# Altium PCB BB8_BMS.PcbDoc
Units mil, origin at the board's own origin, x right, y up, seen from the top; angles counter-clockwise.
Board outline 3812.11 x 6350 mil, 2 copper layers (Top Layer, Bottom Layer), stack 59.8 mil thick; 116 components, 159 nets, 458 pads, 0 vias.
Unrouted connection lines stored in the file: 281.
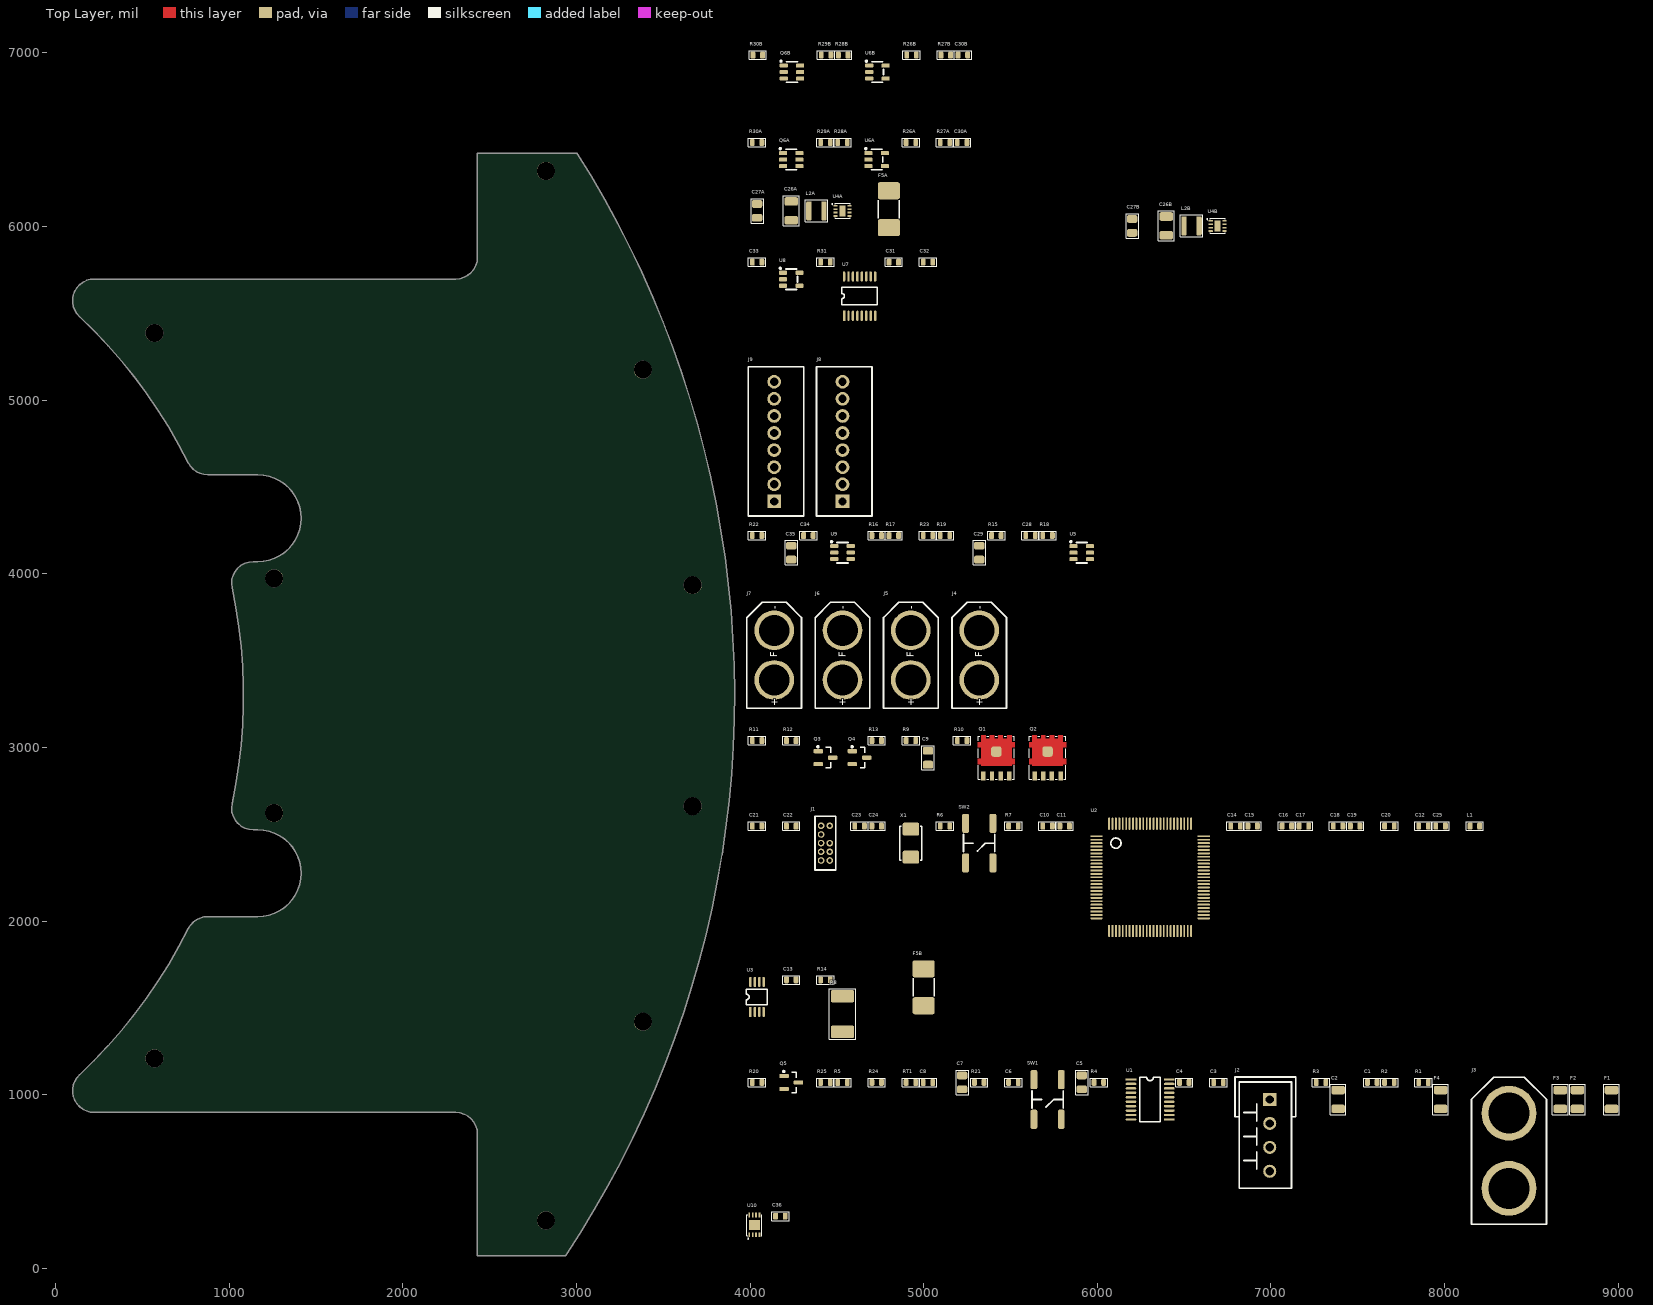
[diagram p0: Top Layer view]
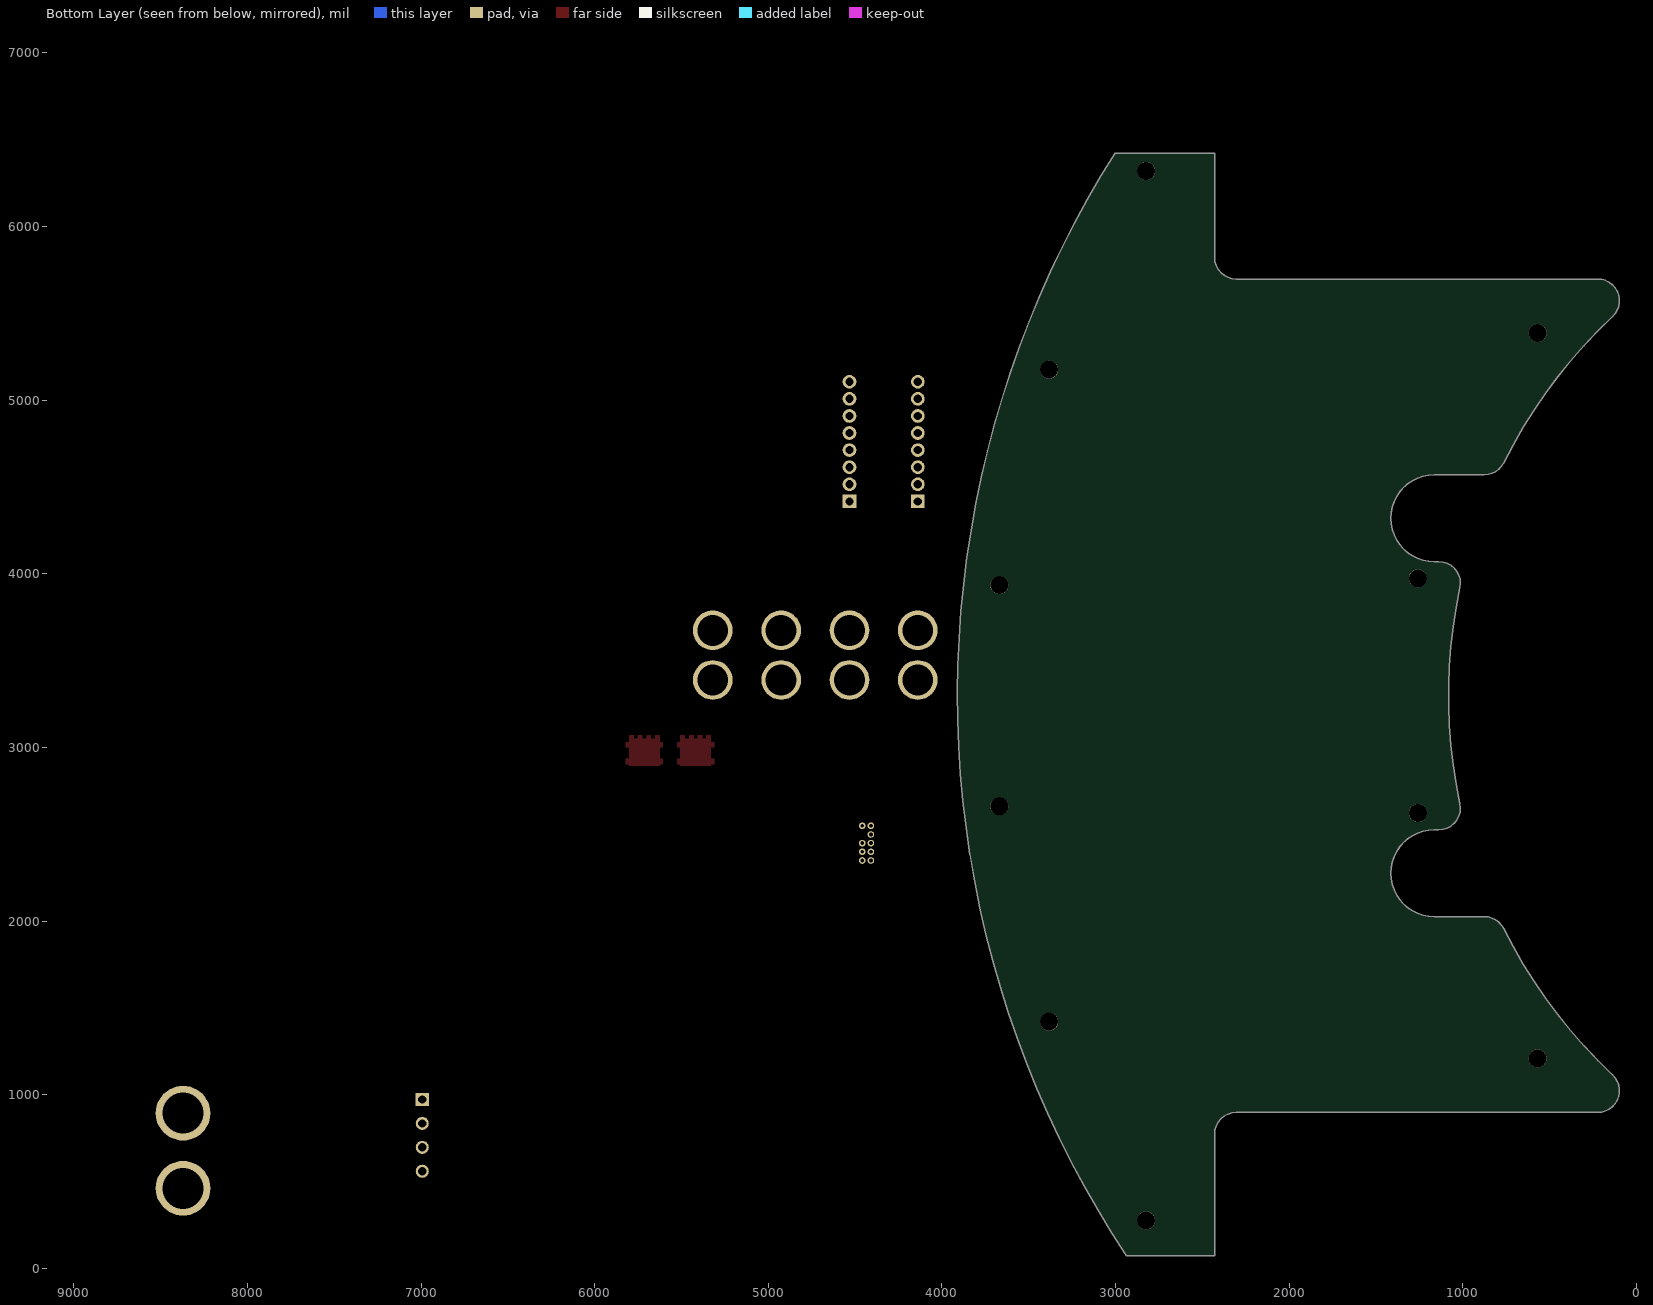
[diagram p1: Bottom Layer view, seen from below]

## Layer stack, top to bottom
Top Solder: solder mask 0.4, Solder Resist, Dk 3.5
Top Layer: signal copper 1.4
Dielectric 1: dielectric 57, FR-4, Dk 4.8
Bottom Layer: signal copper 1.4
Bottom Solder: solder mask 0.4, Solder Resist, Dk 3.5

## Board outline
876.98,4570.3 854.05,4572.42 831.9,4578.71 811.28,4588.96 792.89,4602.82 777.35,4619.81 765.2,4639.37 710.65,4743.24 652.09,4844.91 589.59,4944.2 523.26,5040.97 453.19,5135.07 379.49,5226.36 302.27,5314.69 221.66,5399.94 137.77,5481.96 122.58,5499.13 110.78,5518.78 102.77,5540.25 98.81,5562.82 99.04,5585.74 103.46,5608.23 111.9,5629.54 124.09,5648.95 139.62,5665.8 157.97,5679.54 178.52,5689.7 200.57,5695.93 223.4,5698.03 2305.15,5698.03 2329.54,5700.43 2352.99,5707.55 2374.6,5719.1 2393.54,5734.64 2409.08,5753.58 2420.64,5775.2 2427.75,5798.64 2430.15,5823.03 2430.15,6423.03 3002.82,6423.03 3084.75,6290.08 3163.08,6154.98 3237.77,6017.83 3308.76,5878.73 3375.99,5737.78 3439.43,5595.08 3499.03,5450.73 3554.73,5304.84 3606.51,5157.5 3654.33,5008.84 3698.15,4858.94 3737.93,4707.93 3773.66,4555.9 3805.31,4402.98 3832.84,4249.26 3856.26,4094.86 3875.52,3939.88 3890.63,3784.45 3901.58,3628.67 3908.34,3472.65 3910.93,3316.5 3909.33,3160.34 3903.55,3004.28 3893.6,2848.43 3879.47,2692.91 3861.19,2537.81 3838.76,2383.27 3812.19,2229.38 3781.52,2076.25 3746.75,1924 3707.92,1772.74 3665.06,1622.57 3618.18,1473.61 3567.34,1325.95 3512.56,1179.71 3453.88,1034.98 3391.34,891.88 3325,750.51 3254.9,610.96 3181.08,473.34 3103.6,337.75 3022.52,204.28 2937.9,73.03 2430.15,73.03 2430.15,773.03 2427.75,797.42 2420.64,820.87 2409.08,842.48 2393.54,861.42 2374.6,876.96 2352.99,888.52 2329.54,895.63 2305.15,898.03 223.4,898.03 200.57,900.13 178.52,906.36 157.97,916.52 139.62,930.26 124.09,947.11 111.9,966.52 103.46,987.83 99.04,1010.32 98.81,1033.24 102.77,1055.81 110.78,1077.28 122.58,1096.93 137.77,1114.1 221.66,1196.12 302.27,1281.37 379.49,1369.7 453.19,1460.99 523.26,1555.09 589.59,1651.86 652.09,1751.15 710.65,1852.82 765.2,1956.69 777.35,1976.25 792.89,1993.24 811.28,2007.1 831.9,2017.35 854.05,2023.64 876.98,2025.76 1165.19,2025.76 1197.82,2027.9 1229.89,2034.28 1260.86,2044.79 1290.19,2059.25 1317.38,2077.42 1341.97,2098.98 1363.53,2123.57 1381.7,2150.76 1396.16,2180.09 1406.67,2211.06 1413.05,2243.13 1415.19,2275.76 1413.05,2308.39 1406.67,2340.46 1396.16,2371.43 1381.7,2400.76 1363.53,2427.95 1341.97,2452.54 1317.38,2474.1 1290.19,2492.27 1260.86,2506.73 1229.89,2517.24 1197.82,2523.62 1165.19,2525.76 1139.17,2525.76 1114.61,2528.19 1091.02,2535.4 1069.3,2547.11 1050.3,2562.85 1034.76,2582.02 1023.3,2603.86 1016.34,2627.54 1014.17,2652.11 1016.87,2676.64 1038.32,2788.39 1055.51,2900.89 1068.42,3013.95 1077.04,3127.42 1081.36,3241.13 1081.36,3354.93 1077.04,3468.64 1068.42,3582.11 1055.51,3695.18 1038.32,3807.67 1016.87,3919.42 1014.17,3943.95 1016.34,3968.53 1023.3,3992.2 1034.76,4014.04 1050.3,4033.21 1069.3,4048.95 1091.02,4060.66 1114.61,4067.87 1139.17,4070.3 1165.19,4070.3 1197.82,4072.44 1229.89,4078.82 1260.86,4089.33 1290.19,4103.79 1317.38,4121.96 1341.97,4143.52 1363.53,4168.11 1381.7,4195.3 1396.16,4224.63 1406.67,4255.6 1413.05,4287.67 1415.19,4320.3 1413.05,4352.93 1406.67,4385.01 1396.16,4415.97 1381.7,4445.3 1363.53,4472.49 1341.97,4497.08 1317.38,4518.64 1290.19,4536.81 1260.86,4551.27 1229.89,4561.78 1197.82,4568.16 1165.19,4570.3

## Design rules (kind name [scope] priority, off if disabled: settings)
Clearance Clearance_HV [InNetClass('HV') vs NOT ((OnLayer('Top Overlay') OR OnLayer('Bottom Overlay')))] p1: gap=50 ignorepadtopadclearanceinfootprint=FALSE except(0: Arc-Hole Track-Hole SMDPad-Hole THPad-Hole Via-Hole Fill-Hole Poly-Hole Region-Hole Text-Hole; 40: THPad-THPad)
Clearance Clearance_MV [InNetClass('MV') vs NOT ((OnLayer('Top Overlay') OR OnLayer('Bottom Overlay')))] p2: gap=20 ignorepadtopadclearanceinfootprint=FALSE except(0: Arc-Hole Track-Hole SMDPad-Hole THPad-Hole Via-Hole Fill-Hole Poly-Hole Region-Hole Text-Hole)
Clearance "Polygon Clearance" [InPoly] p3: gap=16 ignorepadtopadclearanceinfootprint=FALSE except(0: Arc-Hole Track-Hole SMDPad-Hole THPad-Hole Via-Hole Fill-Hole Poly-Hole Region-Hole Text-Hole)
Clearance [NOT ((OnLayer('Top Overlay') OR OnLayer('Bottom Overlay')))] p4: gap=7.5 ignorepadtopadclearanceinfootprint=FALSE except(0: Arc-Hole Track-Hole SMDPad-Hole THPad-Hole Via-Hole Fill-Hole Poly-Hole Region-Hole Text-Hole)
DiffPairsRouting [All] p1: maxlimit=12 minlimit=7.5 mostfreqgap=7.5 toplayer_minwidth=6 toplayer_maxwidth=12 toplayer_prefwidth=10 bottomlayer_minwidth=6 bottomlayer_maxwidth=12 bottomlayer_prefwidth=10 maxuncoupledlength=500
HoleSize [All] p1: absolutevalues=TRUE maxlimit=250 minlimit=15 maxpercent=80.000 minpercent=20.000
MinimumSolderMaskSliver [All] p1 off: minsoldermaskwidth=4
PlaneClearance PlaneClearance_HV [InNetClass('HV')] p1: clearance=50
PlaneClearance PlaneClearance_MV [InNetClass('MV')] p2: clearance=30
PlaneClearance [All] p3: clearance=20
PlaneConnect [All] p1: planeconnectstyle=Relief reliefexpansion=10 reliefentries=4 reliefconductorwidth=12 reliefairgap=6
PolygonConnect PolygonConnectVias [IsVia] p1: connectstyle=Direct reliefconductorwidth=10 reliefentries=4 polygonreliefangle="90 Angle" airgapwidth=10
PolygonConnect [All] p2: connectstyle=Relief reliefconductorwidth=12 reliefentries=4 polygonreliefangle="90 Angle" airgapwidth=7.5
RoomDefinition U_FRAM [InComponentClass('U_FRAM')] p1: confinementstyle=ConfineIn formatcopy=TRUE lockcomponents=FALSE outline 3950,150 4250,150 4250,400 3950,400
RoomDefinition U_Volt_Meas2 [InComponentClass('U_Volt_Meas2')] p2: confinementstyle=ConfineIn formatcopy=TRUE lockcomponents=FALSE outline 3946.27,6791.34 5324.22,6791.34 5324.22,7086.61 3946.27,7086.61
RoomDefinition U_Volt_Meas1 [InComponentClass('U_Volt_Meas1')] p3: confinementstyle=ConfineIn formatcopy=TRUE lockcomponents=FALSE outline 3942.32,6287.4 5320.28,6287.4 5320.28,6582.68 3942.32,6582.68
RoomDefinition U_Temp_Mux [InComponentClass('U_Temp_Mux')] p4: confinementstyle=ConfineIn formatcopy=TRUE lockcomponents=FALSE outline 3942.32,5401.58 5123.43,5401.58 5123.43,5893.7 3942.32,5893.7
RoomDefinition U_Current_Meas [InComponentClass('U_Current_Meas')] p5: confinementstyle=ConfineIn formatcopy=TRUE lockcomponents=FALSE outline 3942.32,1267.72 4631.3,1267.72 4631.3,1759.84 3942.32,1759.84
RoomDefinition U_Buck_Regulator2 [InComponentClass('U_Buck_Regulator2')] p6: confinementstyle=ConfineIn formatcopy=TRUE lockcomponents=FALSE outline 6102.36,5905.51 6791.34,5905.51 6791.34,6200.79 6102.36,6200.79
RoomDefinition U_Buck_Regulator1 [InComponentClass('U_Buck_Regulator1')] p7: confinementstyle=ConfineIn formatcopy=TRUE lockcomponents=FALSE outline 3942.32,5992.13 4631.3,5992.13 4631.3,6287.4 3942.32,6287.4
RoutingVias [All] p1: holewidth=15 width=30 viastyle="Through Hole" minholewidth=15 minwidth=20 maxholewidth=250 maxwidth=500
SMDNeckDown [All] p1: percent=100.000
SilkToSilkClearance [All] p1 off: silktosilkclearance=10
SilkToSolderMaskClearance [IsPad] p1: minsilkscreentomaskgap=6 clearancetoexposedcopper=TRUE
SolderMaskExpansion [All] p1: expansion=4
ViasUnderSMD [All] p1: allowed=FALSE
Width [All] p1: maxlimit=1000 minlimit=6 preferedwidth=10 minimp=50.000000 maximp=50.000000 favimp=50.000000 checkconnectedcopper=TRUE
23 further rules are at their usual default settings.

## Classes and differential pairs
component class U_FRAM: C36 U10
channel class Volt_Meas: U_Volt_Meas1 U_Volt_Meas2
component class U_Volt_Meas2: C30B Q6B R26B R27B R28B R29B R30B U6B
component class U_Volt_Meas1: C30A Q6A R26A R27A R28A R29A R30A U6A
component class U_Temp_Mux: C31 C32 C33 R31 U7 U8
channel class Buck_Regulator: U_Buck_Regulator1 U_Buck_Regulator2
component class U_Temp_Meas: J8 J9
component class U_Power_Regulation: C28 C29 C34 C35 R15 R16 R17 R18 R19 R22 R23 U5 U9
component class U_Power_Distribution: J4 J5 J6 J7
component class U_Buck_Regulator2: C26B C27B F5B L2B U4_U_Buck_Regulator2 U4B
component class U_Buck_Regulator1: C26A C27A F5A L2A U4_U_Buck_Regulator1 U4A
component class U_Power_Control: C9 Q1 Q2 Q3 Q4 R9 R10 R11 R12 R13
component class U_Micro: C10 C11 C12 C14 C15 C16 C17 C18 C19 C20 C21 C22 C23 C24 C25 J1 L1 R6 R7 SW2 U2 X1
component class U_Current_Meas: C13 R8 R14 U3
component class U_Batt_Meas: C1 C2 C3 C4 C5 C6 C7 C8 F1 F2 F3 F4 J2 J3 Q5 R1 R2 R3 R4 R5 R20 R21 R24 R25 RT1 SW1 U1

## Components (designator, comment, footprint, x,y, rotation, side; value= is the part's Value field where it differs from the comment)
C1 "CAP 1uF 16V X7R" 0603_CAPACITOR 7584.06,1070.87 r0 top value=1uF
C2 "CAP 10uF 50V X5R" 1206_CAPACITOR 7387.21,972.44 r90 top value=10uF
C3 "CAP 1uF 16V X7R" 0603_CAPACITOR 6698.23,1070.87 r0 top value=1uF
C4 "CAP 1uF 16V X7R" 0603_CAPACITOR 6501.38,1070.87 r0 top value=1uF
C5 "CAP 4.7uF 16V X5R" 0805_Capacitor 5910.83,1070.87 r90 top value=4.7uF
C6 "CAP 1uF 16V X7R" 0603_CAPACITOR 5517.13,1070.87 r0 top value=1uF
C7 "CAP 1uF 16V X7R" 0805_Capacitor 5221.85,1070.87 r90 top value=1uF
C8 "CAP 1uF 16V X7R" 0603_CAPACITOR 5025,1070.87 r0 top value=1uF
C9 "CAP 0.01uF 50V X7R" 0805_Capacitor 5025,2940.95 r90 top value=0.01uF
C10 "CAP 0.1uF 50V X7R" 0603_CAPACITOR 5713.98,2547.24 r0 top value=0.1uF
C11 "CAP 0.1uF 50V X7R" 0603_CAPACITOR 5812.4,2547.24 r0 top value=0.1uF
C12 "CAP 1uF 16V X7R" 0603_CAPACITOR 7879.33,2547.24 r0 top value=1uF
C13 "CAP 0.1uF 50V X7R" 0603_CAPACITOR 4237.6,1661.42 r0 top value=0.1uF
C14 "CAP 1uF 16V X7R" 0603_CAPACITOR 6796.65,2547.24 r0 top value=1uF
C15 "CAP 0.1uF 50V X7R" 0603_CAPACITOR 6895.08,2547.24 r0 top value=0.1uF
C16 "CAP 0.1uF 50V X7R" 0603_CAPACITOR 7091.93,2547.24 r0 top value=0.1uF
C17 "CAP 0.1uF 50V X7R" 0603_CAPACITOR 7190.35,2547.24 r0 top value=0.1uF
C18 "CAP 0.1uF 50V X7R" 0603_CAPACITOR 7387.21,2547.24 r0 top value=0.1uF
C19 "CAP 0.1uF 50V X7R" 0603_CAPACITOR 7485.63,2547.24 r0 top value=0.1uF
C20 "CAP 0.1uF 50V X7R" 0603_CAPACITOR 7682.48,2547.24 r0 top value=0.1uF
C21 "CAP 2.2uF 16V X5R" 0603_CAPACITOR 4040.75,2547.24 r0 top value=2.2uF
C22 "CAP 2.2uF 16V X5R" 0603_CAPACITOR 4237.6,2547.24 r0 top value=2.2uF
C23 "CAP 18pF 50V NP0" 0603_CAPACITOR 4631.3,2547.24 r0 top value=18pF
C24 "CAP 18pF 50V NP0" 0603_CAPACITOR 4729.72,2547.24 r0 top value=18pF
C25 "CAP 0.1uF 50V X7R" 0603_CAPACITOR 7977.76,2547.24 r0 top value=0.1uF
C26A "CAP 10uF 50V X5R" 1206_CAPACITOR 4237.6,6090.55 r90 top value=10uF (schematic designator C26)
C26B "CAP 10uF 50V X5R" 1206_CAPACITOR 6397.64,6003.94 r90 top value=10uF (schematic designator C26)
C27A "CAP 22uF 16V X5R" 0805_Capacitor 4040.75,6090.55 r90 top value=22uF (schematic designator C27)
C27B "CAP 22uF 16V X5R" 0805_Capacitor 6200.79,6003.94 r90 top value=22uF (schematic designator C27)
C28 "CAP 0.1uF 50V X7R" 0603_CAPACITOR 5615.55,4220.47 r0 top value=0.1uF
C29 "CAP 4.7uF 16V X5R" 0805_Capacitor 5320.28,4122.05 r90 top value=4.7uF
C30A "CAP 0.1uF 50V X7R" 0603_CAPACITOR 5221.85,6484.25 r0 top value=0.1uF (schematic designator C30)
C30B "CAP 0.1uF 50V X7R" 0603_CAPACITOR 5225.8,6988.19 r0 top value=0.1uF (schematic designator C30)
C31 "CAP 0.1uF 50V X7R" 0603_CAPACITOR 4828.15,5795.28 r0 top value=0.1uF
C32 "CAP 0.1uF 50V X7R" 0603_CAPACITOR 5025,5795.28 r0 top value=0.1uF
C33 "CAP 1000pF 50V X7R" 0603_CAPACITOR 4040.75,5795.28 r0 top value=1000pF
C34 "CAP 0.1uF 50V X7R" 0603_CAPACITOR 4336.02,4220.47 r0 top value=0.1uF
C35 "CAP 4.7uF 16V X5R" 0805_Capacitor 4237.6,4122.05 r90 top value=4.7uF
C36 "CAP 0.1uF 50V X7R" 0603_CAPACITOR 4175,300 r0 top value=0.1uF
F1 "3413.0332.22" 1206_Fuse 8962.01,972.44 r90 top value=25A
F2 "3413.0332.22" 1206_Fuse 8765.16,972.44 r90 top value=25A
F3 "3413.0332.22" 1206_Fuse 8666.73,972.44 r90 top value=25A
F4 "3413.0332.22" 1206_Fuse 7977.76,972.44 r90 top value=25A
F5A "0157001.DR" F_157T 4800,6100 r90 top value=1A (schematic designator F5)
F5B "0157001.DR" F_157T 5000,1618.7 r90 top value=1A (schematic designator F5)
J1 "FTS-105-01-L-D" J_Cortex_JTAG 4434.45,2448.82 r90 top
J2 "1843622" 1843622 6993.5,972.44 r0 top
J3 "XT90" J_XT90_Thru 8371.46,677.17 r90 top
J4 "XT60" J_XT60_Thru_Female 5320.28,3531.5 r90 top
J5 "XT60" J_XT60_Thru_Female 4926.58,3531.5 r90 top
J6 "XT60" J_XT60_Thru_Female 4532.87,3531.5 r90 top
J7 "XT60" J_XT60_Thru_Female 4139.17,3531.5 r90 top
J8 "J_PHOENIX_8M_2.5" PHONIEX_8_2.5 4532.87,4712.6 r90 top
J9 "J_PHOENIX_8M_2.5" PHONIEX_8_2.5 4139.17,4712.6 r90 top
L1 "FERRITE 0603" 0603_Inductor 8174.61,2547.24 r0 top value=600R
L2A "NRS3015T2R2M" L_NRS_Series_3.0x3.0mm 4382.87,6090.55 r0 top value=2.2uH (schematic designator L2)
L2B "NRS3015T2R2M" L_NRS_Series_3.0x3.0mm 6542.91,6003.94 r0 top value=2.2uH (schematic designator L2)
Q1 "SI7157DP-T1-GE3" SO-8_PowerPAK(S) 5418.7,2940.95 r0 top
Q2 "SI7157DP-T1-GE3" SO-8_PowerPAK(S) 5713.98,2940.95 r0 top
Q3 "DMN3404L-7" SOT23-3 4434.45,2940.95 r0 top
Q4 "DMN3404L-7" SOT23-3 4631.3,2940.95 r0 top
Q5 "DMP2035U-7" SOT23-3 4237.6,1070.87 r0 top
Q6A "DMC3400SDW-7" SOT23-6 4237.6,6385.83 r0 top (schematic designator Q6)
Q6B "DMC3400SDW-7" SOT23-6 4241.54,6889.76 r0 top (schematic designator Q6)
R1 "R_0603_100_1%" 0603_RESISTOR 7879.33,1070.87 r0 top value=100
R2 "R_0603_100_1%" 0603_RESISTOR 7682.48,1070.87 r0 top value=100
R3 "R_0603_100_1%" 0603_RESISTOR 7288.78,1070.87 r0 top value=100
R4 "R_0603_100_1%" 0603_RESISTOR 6009.25,1070.87 r0 top value=100
R5 "R_0603_100_1%" 0603_RESISTOR 4532.87,1070.87 r0 top value=100
R6 "R_0603_1K_1%" 0603_RESISTOR 5123.43,2547.24 r0 top value=1K
R7 "R_0603_10K_1%" 0603_RESISTOR 5517.13,2547.24 r0 top value=10K
R8 "CSS2H-2512R-L500F" 2512_Resistor 4532.87,1464.57 r90 top value=0.5mR
R9 "R_0603_100K_1%" 0603_RESISTOR 4926.58,3039.37 r0 top value=100K
R10 "R_0603_100K_1%" 0603_RESISTOR 5221.85,3039.37 r0 top value=100K
R11 "R_0603_1M_1%" 0603_RESISTOR 4040.75,3039.37 r0 top value=1M
R12 "R_0603_1M_1%" 0603_RESISTOR 4237.6,3039.37 r0 top value=1M
R13 "R_0603_1K_1%" 0603_RESISTOR 4729.72,3039.37 r0 top value=1K
R14 "R_0603_100K_1%" 0603_RESISTOR 4434.45,1661.42 r0 top value=100K
R15 "R_0603_750K_1%" 0603_RESISTOR 5418.7,4220.47 r0 top value=750K
R16 "R_0603_240K_1%" 0603_RESISTOR 4729.72,4220.47 r0 top value=240K
R17 "R_0603_100K_1%" 0603_RESISTOR 4828.15,4220.47 r0 top value=100K
R18 "R_0603_105K_1%" 0603_RESISTOR 5713.98,4220.47 r0 top value=105K
R19 "R_0603_20K_1%" 0603_RESISTOR 5123.43,4220.47 r0 top value=20K
R20 "R_0603_100K_1%" 0603_RESISTOR 4040.75,1070.87 r0 top value=100K
R21 "R_0603_1K_1%" 0603_RESISTOR 5320.28,1070.87 r0 top value=1K
R22 "R_0603_100K_1%" 0603_RESISTOR 4040.75,4220.47 r0 top value=100K
R23 "R_0603_100K_1%" 0603_RESISTOR 5025,4220.47 r0 top value=100K
R24 "R_0603_10K_1%" 0603_RESISTOR 4729.72,1070.87 r0 top value=10K
R25 "R_0603_10K_1%" 0603_RESISTOR 4434.45,1070.87 r0 top value=10K
R26A "R_0603_100K_1%" 0603_RESISTOR 4926.58,6484.25 r0 top value=100K (schematic designator R26)
R26B "R_0603_100K_1%" 0603_RESISTOR 4930.52,6988.19 r0 top value=100K (schematic designator R26)
R27A "R_0603_100K_1%" 0603_RESISTOR 5123.43,6484.25 r0 top value=100K (schematic designator R27)
R27B "R_0603_100K_1%" 0603_RESISTOR 5127.37,6988.19 r0 top value=100K (schematic designator R27)
R28A "R_0603_1K_1%" 0603_RESISTOR 4532.87,6484.25 r0 top value=1K (schematic designator R28)
R28B "R_0603_1K_1%" 0603_RESISTOR 4536.82,6988.19 r0 top value=1K (schematic designator R28)
R29A "R_0603_20K_1%" 0603_RESISTOR 4434.45,6484.25 r0 top value=20K (schematic designator R29)
R29B "R_0603_20K_1%" 0603_RESISTOR 4438.39,6988.19 r0 top value=20K (schematic designator R29)
R30A "R_0603_100K_1%" 0603_RESISTOR 4040.75,6484.25 r0 top value=100K (schematic designator R30)
R30B "R_0603_100K_1%" 0603_RESISTOR 4044.69,6988.19 r0 top value=100K (schematic designator R30)
R31 "R_0603_10K_1%" 0603_RESISTOR 4434.45,5795.28 r0 top value=10K
RT1 "NCU18XH103F60RB" 0603_Resistor 4926.58,1070.87 r0 top value=10K
SW1 "SW_TACT_SWITCH_6x6" SW_6x6mm_SMD 5713.98,972.44 r90 top
SW2 "SW_TACT_SWITCH_6x6" SW_6x6mm_SMD 5320.28,2448.82 r90 top
U1 "BQ7692003PWR" TSSOP-20 6304.53,972.44 r0 top
U2 "STM32F405VGT6" LQFP-100 6304.53,2251.97 r0 top
U3 "MAX4070AUA+" uMAX-8 4040.75,1562.99 r90 top
U4A "TPS62160DSGR" WFDFN-8-EP 4532.87,6090.55 r0 top (schematic designator U4)
U4B "TPS62160DSGR" WFDFN-8-EP 6692.91,6003.94 r0 top (schematic designator U4)
U5 "SIP32509" SOT23-6 5910.83,4122.05 r0 top
U6A "TLV271CW5-7" SOT23-5 4729.72,6385.83 r0 top (schematic designator U6)
U6B "TLV271CW5-7" SOT23-5 4733.67,6889.76 r0 top (schematic designator U6)
U7 "U_MAX4581" TSSOP-16 4631.3,5598.43 r90 top
U8 "TLV271CW5-7" SOT23-5 4237.6,5696.85 r0 top
U9 "SIP32509" SOT23-6 4532.87,4122.05 r0 top
U10 "MB85RC64TAPN-G-AMEWE1" WFDFN-8-EP-Long 4025,250 r90 top
X1 "ABM3-8.000MHZ-D2Y-T" X_ABM3 4926.58,2448.82 r90 top value=8MHz

## Footprints (in the part's own frame and the unit in brackets; to place one, negate y for a bottom-side part, rotate by r counter-clockwise, add the part's x,y. Pads: shape width x height; smd on the part's side, far side on the other; paste and mask are expansions set on the pad)
0603_CAPACITOR [mm] "0603 Capacitor"
  rrect50% 0.7x1 smd: 1(-0.7,0) 2(0.7,0)
  silkscreen extent -1.27,-0.64 1.27,0.64, body extent -0.8,-0.4 0.8,0.4, height 0.3
0603_Inductor [mm] "0603 Inductor"
  rrect50% 0.7x1 smd: 1(-0.7,0) 2(0.7,0)
  silkscreen extent -1.27,-0.64 1.27,0.64, body extent -0.8,-0.4 0.8,0.4, height 0.8
0603_RESISTOR [mm] "0603 RESISTOR"
  rrect50% 0.7x1 smd: 1(-0.7,0) 2(0.7,0)
  silkscreen extent -1.27,-0.64 1.27,0.64, body extent -0.8,-0.4 0.8,0.4, height 0.3
0603_Resistor [mm] "0603 RESISTOR"
  rrect50% 0.7x1 smd: 1(-0.7,0) 2(0.7,0)
  silkscreen extent -1.27,-0.64 1.27,0.64, body extent -0.8,-0.4 0.8,0.4, height 0.3
0805_Capacitor [mil] "0805 Capacitor"
  rrect50% 45x60 smd: 1(-40,0) 2(40,0)
  silkscreen extent -70,-37 70,35, body extent -39,-25 39,25, height 30
1206_CAPACITOR [mm] "1206 Resistor/Capacitor"
  rrect50% 1.25x2 smd: 1(-1.375,0) 2(1.375,0)
  silkscreen extent -2.2,-1.14 2.2,1.14, body extent -1.6,-0.8 1.6,0.8, height 1
1206_Fuse [mm] "1206 Fuse"
  rrect50% 1.25x2 smd: 1(-1.375,0) 2(1.375,0)
  silkscreen extent -2.2,-1.14 2.2,1.14, body extent -1.61,-0.79 1.61,0.81, height 0.68
2512_Resistor [mm] "2512 Resistor"
  rrect25% 1.8x3.4 smd: 1(2.6,0) 2(-2.6,0)
  silkscreen extent -3.68,-1.91 3.68,1.91, body extent -3.35,-1.6 3.35,1.6, height 0.56
1843622 [mil]
  rect 75x75 hole 47: 1(0,0)
  round 75 hole 47: 2(0,-137.8) 3(0,-275.59) 4(0,-413.39)
  silkscreen extent -200,-512 150,130, body extent -168,-510 118,96, height 363
F_157T [mm] "Littelfuse 157T"
  rrect25% 2.5x3.25 smd: 1(-2.7,0) 2(2.7,0)
  silkscreen extent -1.3,-1.53 1.3,1.53, body extent -3.43,-1.58 3.43,1.58, height 2.65
J_Cortex_JTAG [mil] "JTAG Header for ARM Cortex MCUs"
  round 38 hole 22: 1(-100,-25) 2(-100,25) 3(-50,-25) 4(-50,25) 5(0,-25) 6(0,25) 8(50,25) 9(100,-25) 10(100,25)
  silkscreen extent -155,-60 155,60, body extent -127,-86 123,89, height 230
J_XT60_Thru_Female [mm]
  round 5.8 hole 4.5: 1(-3.625,0) 2(3.625,0)
  silkscreen extent -7.75,-4 7.75,4, body extent -7.77,-4.07 8.13,4.08, height 17.21
J_XT90_Thru [mm]
  round 8 hole 6: 1(-5.5,0) 2(5.5,0)
  silkscreen extent -10.75,-5.5 10.75,5.5, body extent -10.7,-5.5 10.7,5.5, height 20.71
L_NRS_Series_3.0x3.0mm [mm] "Taiyo Yuden 3.3mm NRS Series Inductor"
  rrect50% 0.8x2.8 smd: 1(-1.1,0) 2(1.1,0)
  silkscreen extent -1.65,-1.6 1.65,1.6, body extent -1.5,-1.5 1.5,1.5, height 1.46
LQFP-100 [mm] "100 pin LQFP, 0.5mm pitch"
  rect 1.8x0.27 smd: 1(-7.85,6)
  oval 1.8x0.27 smd: 2(-7.85,5.5) 3(-7.85,5) 4(-7.85,4.5) 5(-7.85,4) 6(-7.85,3.5) 7(-7.85,3) 8(-7.85,2.5) 9(-7.85,2) 10(-7.85,1.5) 11(-7.85,1) 12(-7.85,0.5) 13(-7.85,0) 14(-7.85,-0.5) 15(-7.85,-1) 16(-7.85,-1.5) 17(-7.85,-2) 18(-7.85,-2.5) 19(-7.85,-3) 20(-7.85,-3.5) 21(-7.85,-4) 22(-7.85,-4.5) 23(-7.85,-5) 24(-7.85,-5.5) 25(-7.85,-6) 51(7.85,-6) 52(7.85,-5.5) 53(7.85,-5) 54(7.85,-4.5) 55(7.85,-4) 56(7.85,-3.5) 57(7.85,-3) 58(7.85,-2.5) 59(7.85,-2) 60(7.85,-1.5) 61(7.85,-1) 62(7.85,-0.5) 63(7.85,0) 64(7.85,0.5) 65(7.85,1) 66(7.85,1.5) 67(7.85,2) 68(7.85,2.5) 69(7.85,3) 70(7.85,3.5) 71(7.85,4) 72(7.85,4.5) 73(7.85,5) 74(7.85,5.5) 75(7.85,6)
  oval 0.27x1.8 smd: 26(-6,-7.85) 27(-5.5,-7.85) 28(-5,-7.85) 29(-4.5,-7.85) 30(-4,-7.85) 31(-3.5,-7.85) 32(-3,-7.85) 33(-2.5,-7.85) 34(-2,-7.85) 35(-1.5,-7.85) 36(-1,-7.85) 37(-0.5,-7.85) 38(0,-7.85) 39(0.5,-7.85) 40(1,-7.85) 41(1.5,-7.85) 42(2,-7.85) 43(2.5,-7.85) 44(3,-7.85) 45(3.5,-7.85) 46(4,-7.85) 47(4.5,-7.85) 48(5,-7.85) 49(5.5,-7.85) 50(6,-7.85) 76(6,7.85) 77(5.5,7.85) 78(5,7.85) 79(4.5,7.85) 80(4,7.85) 81(3.5,7.85) 82(3,7.85) 83(2.5,7.85) 84(2,7.85) 85(1.5,7.85) 86(1,7.85) 87(0.5,7.85) 88(0,7.85) 89(-0.5,7.85) 90(-1,7.85) 91(-1.5,7.85) 92(-2,7.85) 93(-2.5,7.85) 94(-3,7.85) 95(-3.5,7.85) 96(-4,7.85) 97(-4.5,7.85) 98(-5,7.85) 99(-5.5,7.85) 100(-6,7.85)
  silkscreen extent -5.75,4.25 -4.25,5.75, body extent -8,-8 8,8, height 1.6
PHONIEX_8_2.5 [mm]
  rect 2x2 hole 1.2: 1(-7.5,0)
  round 2 hole 1.2: 2(-5,0) 3(-2.5,0) 4(0,0) 5(2.5,0) 6(5,0) 7(7.5,0) 8(10,0)
  silkscreen extent -9.65,-4.32 12.19,3.81, body extent -9.67,-4.29 12.23,3.81, height 10.1
SO-8_PowerPAK(S) [mm] "PowerPAK Single Mosfet"
  rect 0.65x1.25 smd: 1(-1.905,-2.675) 2(-0.635,-2.675) 3(0.635,-2.675) 4(1.905,-2.675)
  rrect50% 1.524x1.524 smd paste+0 mask+0: 5(0,0.891)
  Top Layer region: -2.23,2.295 -2.695,2.295 -2.695,1.5 -2.23,1.5 -2.23,-0.145 -2.695,-0.145 -2.695,-0.94 -2.23,-0.94 -2.23,-1.15 2.23,-1.15 2.23,-0.94 2.705,-0.94 2.705,-0.145 2.23,-0.145 2.23,1.5 2.705,1.5 2.705,2.295 2.23,2.295 2.23,3.3 1.58,3.3 1.58,2.75 0.96,2.75 0.96,3.3 0.31,3.3 0.31,2.75 -0.31,2.75 -0.31,3.3 -0.96,3.3 -0.96,2.75 -1.58,2.75 -1.58,3.3 -2.23,3.3
  silkscreen extent -2.65,-3.15 2.65,3.13, body extent -2.58,-3.07 2.58,3.08, height 1.04
SOT23-3 [mm] "SOT23, 3-Leads, Body 3.0x2.7mm (max), Pitch 0.95mm, IPC Medium Density"
  rrect50% 1.4x0.6 smd: 1(-1.05,0.95) 2(-1.05,-0.95) 3(1.05,0)
  silkscreen extent -1.22,-1.5 0.76,1.72, body extent -1.21,-1.1 0.99,1.1, height 1.1
SOT23-5 [mm] "SOT23-5 (SOT-25) 0.95mm pitch, 5 pins"
  rrect50% 1.2x0.6 smd: 1(-1.2,0.95) 2(-1.2,0) 3(-1.2,-0.95) 4(1.2,-0.95) 5(1.2,0.95)
  silkscreen extent -1.72,-1.5 0.9,1.72, body extent -1.25,-1.5 1.25,1.5, height 1.45
SOT23-6 [mm] "SOT23, 0.95mm pitch, 6 pins"
  rrect50% 1.2x0.6 smd: 1(-1.2,0.95) 2(-1.2,0) 3(-1.2,-0.95) 4(1.2,-0.95) 5(1.2,0) 6(1.2,0.95)
  silkscreen extent -1.72,-1.5 0.8,1.72, body extent -1.4,-1.45 1.4,1.45, height 1.45
SW_6x6mm_SMD [mm]
  rrect50% 2.8x1 smd: 1(-2.9,2) 2(-2.9,-2) 3(2.9,-2) 4(2.9,2)
  silkscreen extent -1.25,-2.29 1.25,2.29, body extent -3.4,-3.1 3.4,3.1, height 3.48
TSSOP-16 [mm] "0.65mm pitch TSSOP"
  rect 1.5x0.35 smd: 1(-2.85,2.275)
  oval 1.5x0.35 smd: 2(-2.85,1.625) 3(-2.85,0.975) 4(-2.85,0.325) 5(-2.85,-0.325) 6(-2.85,-0.975) 7(-2.85,-1.625) 8(-2.85,-2.275) 9(2.9,-2.275) 10(2.9,-1.625) 11(2.9,-0.975) 12(2.9,-0.325) 13(2.9,0.325) 14(2.9,0.975) 15(2.9,1.625) 16(2.9,2.275)
  silkscreen extent -1.26,-2.6 1.31,2.6, body extent -3.2,-2.55 3.2,2.55, height 1.2
TSSOP-20 [mm] "0.65mm pitch TSSOP"
  rect 1.55x0.35 smd: 1(-2.8,2.925)
  oval 1.55x0.35 smd: 2(-2.8,2.275) 3(-2.8,1.625) 4(-2.8,0.975) 5(-2.8,0.325) 6(-2.8,-0.325) 7(-2.8,-0.975) 8(-2.8,-1.625) 9(-2.8,-2.275) 10(-2.8,-2.925) 11(2.8,-2.925) 12(2.8,-2.275) 13(2.8,-1.625) 14(2.8,-0.975) 15(2.8,-0.325) 16(2.8,0.325) 17(2.8,0.975) 18(2.8,1.625) 19(2.8,2.275) 20(2.8,2.925)
  silkscreen extent -1.5,-3.25 1.5,3.25, body extent -3.2,-3.25 3.2,3.25, height 1.21
uMAX-8 [mm] "Maxium uMAX 8-pin package"
  rect 1.5x0.35 smd: 1(-2.2,0.975)
  oval 1.5x0.35 smd: 2(-2.2,0.325) 3(-2.2,-0.325) 4(-2.2,-0.975) 5(2.2,-0.975) 6(2.2,-0.325) 7(2.2,0.325) 8(2.2,0.975)
  silkscreen extent -1.14,-1.52 1.14,1.55, body extent -2.5,-1.5 2.5,1.5, height 0.95
WFDFN-8-EP [mm] "8 pin 0.5mm pitch WSON package, 2x2mm"
  rrect25% 0.6x0.25 smd: 1(-1,0.75) 2(-1,0.25) 3(-1,-0.25) 4(-1,-0.75) 5(1,-0.75) 6(1,-0.25) 7(1,0.25) 8(1,0.75)
  rrect5% 0.9x1.6 smd: EP(0,0)
  silkscreen extent -1.57,-1.1 1.1,1.1, body extent -1,-1 1,1, height 0.81
WFDFN-8-EP-Long [mm] "8 pin 0.5mm pitch WSON package, 2x3mm"
  rrect25% 0.7x0.25 smd: 1(-1.45,0.75) 2(-1.45,0.25) 3(-1.45,-0.25) 4(-1.45,-0.75) 5(1.45,-0.75) 6(1.45,-0.25) 7(1.45,0.25) 8(1.45,0.75)
  rrect5% 1.5x1.6 smd: EP(0,0)
  silkscreen extent -2.07,-1.1 1.5,1.1, body extent -1.52,-1.01 1.52,0.99, height 0.91
X_ABM3 [mm] "ABM3  Ceramic Crystal"
  rrect25% 1.9x2.4 smd: 1(-2.05,0) 2(2.05,0)
  silkscreen extent -2.5,-1.6 2.5,1.6, body extent -2.5,-1.6 2.5,1.6, height 1.32

## Part data
C1 C3 C4 C6 C8 C12 C14: library part C_0603_1uF_16V_10%, "CAP CERM 1uF 10% 16V 0603", Package=SelectedPackage, Supplier Part Number 1=1276-6524-6-ND, Temperature Coefficient=X7R, Voltage=16V, Supplier 1=Digi-Key, SVP Creator="Spencer Berglund"
C2 C26A C26B: library part C_1206_10uF_50V_20%, "CAP CERM 10uF 20% 50V 1206", Package=SelectedPackage, Supplier Part Number 1=1276-6736-6-ND, Temperature Coefficient=X5R, Voltage=50V, Supplier 1=Digi-Key, SVP Creator="Spencer Berglund"
C5 C29 C35: library part C_0805_4.7uF_16V_10%, "CAP CERM 4.7uF 10% 16V 0805", Package=SelectedPackage, Supplier Part Number 1=1276-1065-6-ND, Temperature Coefficient=X5R, Voltage=16V, Supplier 1=Digi-Key, SVP Creator="Spencer Berglund"
C7: library part C_0805_1uF_16V_10%, "CAP CERM 1uF 10% 16V 0805", Package=SelectedPackage, Supplier Part Number 1=1276-6471-1-ND, Temperature Coefficient=X7R, Voltage=16V, Supplier 1=Digi-Key, SVP Creator="Spencer Berglund"
C9: library part C_0805_0.01uF_50V_10%, "CAP CERM 0.01uF 10% 50V 0805", Package=SelectedPackage, Supplier Part Number 1=1276-1078-1-ND, Temperature Coefficient=X7R, Voltage=50V, Supplier 1=Digi-Key, SVP Creator="Spencer Berglund"
C10 C11 C13 C15 C16 C17 C18 C19 C20 C25 C28 C30A C30B C31 C32 C34 C36: library part C_0603_0.1uF_50V_10%, "CAP CERM 0.1uF 10% 50V 0603", Package=SelectedPackage, Supplier Part Number 1=1276-1000-1-ND, Temperature Coefficient=X7R, Voltage=50V, Supplier 1=Digi-Key, SVP Creator="Spencer Berglund"
C21 C22: library part C_0603_2.2uF_16V_10%, "CAP CERM 2.2uF 10% 16V 0603", Package=SelectedPackage, Supplier Part Number 1=399-7886-6-ND, Temperature Coefficient=X5R, Voltage=16V, Supplier 1=Digi-Key, SVP Creator="Spencer Berglund"
C23 C24: library part C_0603_18pF_50V_5%, "CAP CERM 18pF 5% 50V 0603", Package=SelectedPackage, Supplier Part Number 1=1276-1089-1-ND, Temperature Coefficient=NP0, Voltage=50V, Supplier 1=Digi-Key, SVP Creator="Spencer Berglund"
C27A C27B: library part C_0805_22uF_16V_20%, "CAP CERM 22uF 20% 16V 0805", Package=SelectedPackage, Supplier Part Number 1=1276-6780-6-ND, Temperature Coefficient=X5R, Voltage=16V, Supplier 1=Digi-Key
C33: library part C_0603_1000pF_50V_10%, "CAP CERM 1000pF 10% 50V 0603", Package=SelectedPackage, Supplier Part Number 1=1276-1018-1-ND, Temperature Coefficient=X7R, Voltage=50V, Supplier 1=Digi-Key, SVP Creator="Spencer Berglund"
F1 F2 F3 F4: library part F_3413.0332.22, "FUSE BOARD MOUNT 25A 32VAC 63VDC", Supplier Part Number 1=486-1690-6-ND, Voltage Rating - AC=32V, Voltage Rating - DC=63V, Response Time=Slow, Supplier 1=Digi-Key
F5A F5B: library part F_0157001.DR, "FUSE BRD MNT 1A 125VAC/VDC 2SMD", Current Rating=1A, DC Cold Resistance=153.7mR, Manufacturer=Littelfuse, Max Operating Temperature=125°C, Min Operating Temperature=-55°C, Supplier Part Number 1=F2962DKR-ND, Voltage Rating (AC)=125V, Fuse Current=1A, Manufacturer Part Number=0157001.DR, Supplier 1=Digi-Key, Voltage Rating (DC)=125V
J1: library part J_Cortex_JTAG, "CORTEX JTAG DEBUG CONNECTOR", Manufacturer="Samtec Inc", Supplier Part Number 1=SAM1156-05-ND, Manufacturer PN=FTS-105-01-L-D, Supplier 1=Digi-Key
J2: library part J_PHOENIX_4M_3.5, "4 Pin Male Phoenix Connector 3.5", Supplier Part Number 1=277-5738-ND, Manufacturer PN=1843622, Supplier 1=Digi-Key, SVP Creator="Jonathan Nutzmann"
J3: library part J_XT90, "90 Amp XT90 Connector"
J4 J5 J6 J7: library part J_XT60, "60 Amp XT60 Connector"
J8 J9: "TERM BLOCK HDR 8POS VERT 2.5MM", Color=Green, Current=4A, Manufacturer="Phoenix Contact", Manufacturer Part Number=1881613, Supplier Part Number 1=277-1458-ND, Voltage=125V, Category="Connectors, Interconnects", ComponentLink1Description=http://media.digikey.com/pdf/Data%20Sheets/Phoenix%20Contact%20PDFs/1881613.pdf, ComponentLink1URL=http://media.digikey.com/pdf/Data%20Sheets/Phoenix%20Contact%20PDFs/1881613.pdf, Features=-, Header Orientation=Vertical, Mounting Type="Through Hole", Number of Levels=1, Number of Positions=8, Packaging=Bulk, Pitch="0.098\" (2.50mm)", Plug Wire Entry=-, Positions Per Level=8, Pricing 1="1=3.12, 10=3.034, 50=2.8356, 100=2.6087, 250=2.41024, 500=2.29684, 1000=2.1128 (USD)", RoHS="RoHS Compliant", Stock 1=356, Supplier 1=Digi-Key, Terminal Block Type="Header, Male Pins, Shrouded (4 Side)", Termination=Solder, Wire Gauge=-
L1: library part L_0603_FERRITE, "FERRITE CHIP BEAD 600 OHM SMD 0603", Supplier Part Number 1=490-9702-6-ND, Supplier 1=Digi-Key
L2A L2B: library part L_NRS3015T2R2M, Case/Package=Nonstandard, Current Rating=1.5A, DC Resistance (DCR)=58mR, Manufacturer="Taiyo Yuden", Manufacturer Part Number=NRS3015T2R2MNGH, Max Operating Temperature=120°C, Min Operating Temperature=-25°C, Saturation Current=1.48A, Self Resonant Frequency=64MHz, Supplier Part Number 1=587-3561-6-ND, Test Frequency=100kHz, Tolerance=20%, Composition=Wirewound, Core Material=Ferrite, Shielding=Shielded, Supplier 1=Digi-Key, Supplier 2=Digi-Key, Supplier Part Number 2=587-1648-6-ND
Q1 Q2: library part Q_SI7157DP-T1-GE3, "P-Channel 20V 60A (Tc) 6.25W (Ta), 104W (Tc) Surface Mount PowerPAK® SO-8", Continuous Drain Current (ID)=-60A, Drain to Source Breakdown Voltage=-20V, Drain to Source Resistance=1.25mR, Drain to Source Voltage (Vdss)=20V, Gate to Source Voltage (Vgs)=12V, Input Capacitance=22nF, Max Operating Temperature=150°C, Max Power Dissipation=104W, Power Dissipation=6.25W, Supplier Part Number 1=SI7157DP-T1-GE3CT-ND, Threshold Voltage=-1.4V, Element Configuration=Single, Fall Time=55ns, Manufacturer Part Number=SI7157DP-T1-GE3, Number of Channels=1, Number of Elements=1, Number of Pins=8, Rds On Max=1.6mR, Rise Time=14ns, Supplier 1=Digi-Key, Turn-Off Delay Time=220ns, Turn-On Delay Time=20ns
Q3 Q4: library part Q_DMN3404L-7, "N-Channel 30V 5.8A (Ta) 720mW (Ta) Surface Mount SOT-23-3", Case/Package=SOT-23, Continuous Drain Current (ID)=5.8A, Drain to Source Breakdown Voltage=30V, Drain to Source Resistance=82mR, Gate to Source Voltage (Vgs)=20V, Input Capacitance=386pF, Manufacturer=Diodes, Max Operating Temperature=150°C, Max Power Dissipation=1.4W, Min Operating Temperature=-55°C, On-State Resistance=28mR, Supplier Part Number 1=DMN3404LDICT-ND, Threshold Voltage=1.5V, ComponentLink1Description=http://www.st.com/web/en/resource/technical/document/datasheet/CD00001894.pdf, ComponentLink1URL=http://www.st.com/web/en/resource/technical/document/datasheet/CD00001894.pdf, Drain to Source Voltage (Vdss)=30V, Element Configuration=Single, Fall Time=6.18ns, Manufacturer Part Number=DMN3404L-7, Nominal Vgs=1.5V, Power Dissipation=1.4W, Rds On Max=28mR, Rise Time=6.18ns, Supplier 1=Digi-Key, Turn-Off Delay Time=13.92ns, Turn-On Delay Time=3.41ns
Q5: library part Q_DMP2035U-7, "P-Channel 20V 3.6A (Ta) 810mW (Ta) Surface Mount SOT-23-3", Continuous Drain Current (ID)=3.6A, Drain to Source Breakdown Voltage=-20V, Drain to Source Resistance=23mR, Drain to Source Voltage (Vdss)=20V, Gate to Source Voltage (Vgs)=8V, Input Capacitance=1.61nF, Manufacturer=Diodes, Max Operating Temperature=150°C, Max Power Dissipation=810mW, Min Operating Temperature=-55°C, On-State Resistance=62mR, Supplier Part Number 1=DMP2035U-7DIDKR-ND, ComponentLink1Description=http://www.st.com/web/en/resource/technical/document/datasheet/CD00001894.pdf, ComponentLink1URL=http://www.st.com/web/en/resource/technical/document/datasheet/CD00001894.pdf, Fall Time=42.4ns, Manufacturer Part Number=DMP2035U-7, Power Dissipation=810mW, Rds On Max=35mR, Rise Time=12.4ns, Supplier 1=Digi-Key, Turn-Off Delay Time=94.1ns, Turn-On Delay Time=16.8ns
Q6A Q6B: library part Q_DMC3400SDW, "Mosfet Array N and P-Channel 30V 650mA, 450mA 310mW Surface Mount SOT-363", Continuous Drain Current (ID)=450mA, Drain to Source Voltage (Vdss)=30V, Input Capacitance=55pF, Manufacturer=Diodes, Max Operating Temperature=150°C, Max Power Dissipation=310mW, Min Operating Temperature=-55°C, Supplier Part Number 1=DMC3400SDW-7DIDKR-ND, ComponentLink1Description=http://www.st.com/web/en/resource/technical/document/datasheet/CD00001894.pdf, ComponentLink1URL=http://www.st.com/web/en/resource/technical/document/datasheet/CD00001894.pdf, FET Type="N and P-Channel", Manufacturer Part Number=DMC3400SDW-7, Rds On Max=400mR, Supplier 1=Digi-Key
R1 R2 R3 R4 R5: "RES 100 OHM 1/16W 1% 0603 SMD", Package=CurrentFootprint, Power Rating=0.0625W, Supplier Part Number 1=311-100HRCT-ND, Supplier 1=Digi-Key, SVP Creator="Spencer Berglund"
R6 R13 R21 R28A R28B: "RES 1K OHM 1/16W 1% 0603 SMD", Package=CurrentFootprint, Power Rating=0.0625W, Supplier Part Number 1=311-1.00KHRCT-ND, Supplier 1=Digi-Key, SVP Creator="Spencer Berglund"
R7 R24 R25 R31: "RES 10K OHM 1/16W 1% 0603 SMD", Package=CurrentFootprint, Power Rating=0.0625W, Supplier Part Number 1=311-10.0KHRCT-ND, Supplier 1=Digi-Key, SVP Creator="Spencer Berglund"
R8: library part R_CSS2H-2512R-L500F, "500 µOhms ±1% 6W Chip Resistor 2512 (6432 Metric) Current Sense, Moisture Resistant Metal Element", Case/Package=2512, Manufacturer=Bourns, Max Operating Temperature=170°C, Max Power Dissipation=6W, Min Operating Temperature=-55°C, Resistance=0.5mR, Supplier Part Number 1=CSS2H-2512R-L500FCT-ND, Temperature Coefficient=50ppm/°C, Tolerance=1%, Height=0.037inch, Length=0.25inch, Manufacturer Part Number=CSS2H-2512R-L500F, Power Rating=6W, Supplier 1=Digi-Key
R9 R10 R14 R17 R20 R22 R23 R26A R26B R27A R27B R30A R30B: "RES 100K OHM 1/16W 1% 0603 SMD", Package=CurrentFootprint, Power Rating=0.0625W, Supplier Part Number 1=311-100KHRCT-ND, Supplier 1=Digi-Key, SVP Creator="Spencer Berglund"
R11 R12: "RES 1M OHM 1/16W 1% 0603 SMD", Package=CurrentFootprint, Power Rating=0.0625W, SVP Creator="Spencer Berglund"
R15: "RES 750K OHM 1/16W 1% 0603 SMD", Package=CurrentFootprint, Power Rating=0.0625W, Supplier Part Number 1=311-750KHRDKR-ND, Supplier 1=Digi-Key
R16: "RES 240K OHM 1/16W 1% 0603 SMD", Package=CurrentFootprint, Power Rating=0.0625W, Supplier Part Number 1=311-240KHRDKR-ND, Supplier 1=Digi-Key
R18: "RES 105K OHM 1/16W 1% 0603 SMD", Package=CurrentFootprint, Power Rating=0.0625W, Supplier Part Number 1=311-105KHRDKR-ND, Supplier 1=Digi-Key
R19 R29A R29B: "RES 20K OHM 1/16W 1% 0603 SMD", Package=CurrentFootprint, Power Rating=0.0625W, Supplier Part Number 1=311-20.0KHRCT-ND, Supplier 1=Digi-Key
RT1: library part RT_NCU18XH103F60RB, "NTC Thermistor 10k 0603 (1608 Metric)", Manufacturer=Murata, Max Operating Temperature=125°C, Min Operating Temperature=-40°C, Supplier Part Number 1=490-16279-6-ND, Manufacturer Part Number=NCU18XH103F60RB, Supplier 1=Digi-Key
SW1 SW2: "SWITCH TACT 6MM BLACK 160GF", Package="6mm x 6mm", Supplier Part Number 1=CKN10425CT-ND, Supplier 1=Digi-Key, SVP Creator="Spencer Berglund"
U1: library part U_BQ7692003PWR, "Battery Battery Monitor IC Multi-Chemistry 20-TSSOP", Supplier Part Number 1=296-39959-6-ND, Supplier 1=Digi-Key
U2: library part U_STM32F405VGT6, "IC MCU 32BIT 1MB FLASH 100LQFP", Manufacturer=STMicroelectronics, Supplier Part Number 1=497-11910-ND, Part Number=STM32F405VGT6, Supplier 1=Digi-Key
U3: library part U_MAX4070, "Current Sense Amplifier 1 Circuit 8-uMAX", Supplier Part Number 1=700-MAX4070AUA, Supplier 1=Mouser
U4A U4B: library part U_TPS62160, "Buck Switching Regulator IC Positive Adjustable 0.9V 1 Output 1A", Supplier Part Number 1=296-29895-6-ND, Supplier 1=Digi-Key
U5 U9: library part U_SIP32509, "IC LOAD SWITCH", Supplier Part Number 1=SIP32509DT-T1-GE3DKR-ND, Supplier 1=Digi-Key
U6A U6B U8: library part U_TLV27, "CMOS Amplifier 1 Circuit Rail-to-Rail SOT-25", Input Bias Current=1pA, Input Offset Voltage (Vos)=500uV, Manufacturer=Diodes, Max Frequency=10kHz, Max Operating Temperature=70°C, Max Supply Voltage=16V, Min Dual Supply Voltage=1.35V, Min Operating Temperature=0°C, Min Supply Voltage=2.7V, Operating Supply Current=550uA, Output Current per Channel=8mA, Power Dissipation=220mW, Power Supply Rejection Ratio (PSRR)=70dB, Supplier Part Number 1=TLV271CW5-7DIDKR-ND, Voltage Gain=110dB, Common Mode Rejection Ratio=65dB, Gain Bandwidth Product=1.9MHz, Manufacturer Part Number=TLV271CW5-7, Slew Rate=2V/µs, Supplier 1=Digi-Key, Unity Gain Bandwidth Product=1.9MHz, Width=1.7mm
U7: Supplier Part Number 1=MAX4581EUE+-ND, Supplier 1=Digi-Key
U10: library part U_MB85RC64TA, "FRAM (Ferroelectric RAM) Memory IC 64Kb (8K x 8) I²C 3.4MHz 8-SON", Manufacturer=Fujitsu, Supplier Part Number 1=865-1275-6-ND, Manufacturer Part Number=MB85RC64TAPN-G-AMEWE1, Supplier 1=Digi-Key
X1: library part X_ABM3_8MHz, "Crystal 8.0000MHz 20ppm 18pF 140 Ohm -40°C - 85°C Surface Mount 2-SMD", Supplier Part Number 1=535-10630-1-ND, Supplier 1=Digi-Key, SVP Creator="Spencer Berglund"

## Free pads (board coordinates)
  round 104 hole 104: 1(569.8,1208.97) 1(569.8,5387.09) 1(1259.13,2622.32) 1(1259.13,3973.74) 1(2824.23,275.72) 1(2824.23,6320.34) 1(3382.51,1420.37) 1(3382.51,5175.69) 1(3668.99,2661.26) 1(3668.99,3934.8)

## Nets (pads, with @x,y where several pads share a name; then routed paths per layer and width w, separated by ;. In a path a pad name is that pad's centre, name@x,y a point inside that pad or via, vN(x,y) a via of type N, cw(c..) or ccw(c..) an arc to the next point about the centre after c; other vN are vias at no path point)
3V3: C28.1 C30A.1 C30B.1 C31.1 C32.1 C36.1 L1.1 R31.2 U5.1 U5.2 U6A.5 U6B.5 U7.16 U8.5 U10.8
3V3_BQ: C5.1 Q5.2 R20.2 U1.8 U4B.3
3V3_EXT: C34.1 U9.1 U9.2
3V3_LP: C11.1 C14.1 C15.1 C16.1 C17.1 C18.1 C19.1 C20.1 C27B.1 C29.1 C35.1 J1.1 L2B.2 R7.2 R15.2 R24.2 R25.2 U2.6 U2.11 U2.19 U2.28 U2.50 U2.75 U2.100 U4B.6 U5.5 U5.6 U9.5 U9.6
3V3A: C10.1 C12.1 C25.1 L1.2 U2.21 U2.22
5V: C27A.1 L2A.2 R18.2 U4A.6
Alert: Q5.3 U1.20
BAT_ALERT_FORCE: Q5.1 R20.1
BOOT: RT1.2 SW1.1 SW1.4 U1.6
BQ_Bat: C2.1 R2.2 U1.10
Cap1: C7.2 U1.7
Cell_Meas_0: C8.2 R5.2 U1.17
Cell_Meas_1: C4.2 C6.1 R4.2 U1.16
Cell_Meas_2: C1.2 C4.1 R3.2 U1.13 U1.14 U1.15
Cell_Meas_3: C1.1 R1.2 U1.12
Cell_Raw_0: J2.4 R5.1
Cell_Raw_1: J2.3 R4.1 R21.1
Cell_Raw_2: J2.2 R3.1
Cell_Raw_3: J2.1 R1.1
CHARGE_EN: Q4.1 R12.2 U1.2
Charge_En_Gate: Q2.4 Q4.3 R10.2
CUR_GAIN_SEL: U3.8
CUR_MEAS_OUT: U3.6
CUR_MEAS_REF: U3.5
CUR_SHDN: R14.2 U3.1
DISCHARGE_EN: Q3.1 R11.2 U1.1
Discharge_En_Gate: C9.2 Q1.4 R9.1 R13.2
FBA: R18.1 R19.2 U4A.5
FBB: R15.1 R16.2 U4B.5
FRAM_WP: U10.7
GND: C2.2 C3.2 C5.2 C6.2 C7.1 C8.1 C10.2 C11.2 C12.2 C13.2 C14.2 C15.2 C16.2 C17.2 C18.2 C19.2 C20.2 C21.2 C22.2 C23.2 C24.2 C25.2 C26A.2 C26B.2 C27A.2 C27B.2 C28.2 C29.2 C30A.2 C30B.2 C31.2 C32.2 C33.2 C34.2 C35.2 C36.2 J1.3 J1.5 J1.9 J3.2 J4.2 J5.2 J6.2 J7.2 J8.1 J8.3 J8.5 J8.7 J9.1 J9.3 J9.5 J9.7 Q3.2 Q4.2 Q6A.1 Q6B.1 R6.1 R11.1 R12.1 R14.1 R16.1 R17.1 R19.1 R22.1 R23.1 R29A.1 R29B.1 R30A.1 R30B.1 RT1.1 SW2.1 SW2.4 U1.3 U1.18 U1.19 U2.10 U2.20 U2.27 U2.74 U2.99 U3.4 U4A.1 U4A.4 U4A.EP U4B.1 U4B.4 U4B.EP U5.4 U6A.2 U6B.2 U7.7 U7.8 U8.2 U9.4 U10.1 U10.2 U10.3 U10.4
JTCK: J1.4 U2.76
JTDI: J1.8 U2.77
JTDO: J1.6 U2.89
JTMS: J1.2 U2.72
NetC9_1: C9.1 Q1.5 Q2.5
NetC26A_1: C26A.1 F5A.2 U4A.2
NetC26B_1: C26B.1 F5B.2 U4B.2
NetC33_1: C33.1 R31.1 U7.3 U8.3
NetJ8_2: J8.2 U7.12
NetJ8_4: J8.4 U7.15
NetJ8_6: J8.6 U7.14
NetJ8_8: J8.8 U7.13
NetJ9_2: J9.2 U7.4
NetJ9_4: J9.4 U7.2
NetJ9_6: J9.6 U7.5
NetJ9_8: J9.8 U7.1
NetQ3_3: Q3.3 R13.1
NetQ6A_2: Q6A.2 R30A.2
NetQ6A_3: Q6A.3 R28A.1
NetQ6A_5: Q6A.5 R26A.1 R28A.2
NetQ6A_6: Q6A.6 R27A.2
NetQ6B_2: Q6B.2 R30B.2
NetQ6B_3: Q6B.3 R28B.1
NetQ6B_5: Q6B.5 R26B.1 R28B.2
NetQ6B_6: Q6B.6 R27B.2
NetR6_2: R6.2 U2.94
NetR17_2: R17.2 U5.3
NetR22_2: R22.2 U9.3
NetR23_2: R23.2 U4A.3
NetR27A_1: R27A.1 R29A.2 U6A.3
NetR27B_1: R27B.1 R29B.2 U6B.3
NetU2_1: U2.1
NetU2_2: U2.2
NetU2_3: U2.3
NetU2_4: U2.4
NetU2_5: U2.5
NetU2_7: U2.7
NetU2_15: U2.15
NetU2_16: U2.16
NetU2_17: U2.17
NetU2_18: U2.18
NetU2_23: U2.23
NetU2_24: U2.24
NetU2_25: U2.25
NetU2_26: U2.26
NetU2_29: U2.29
NetU2_30: U2.30
NetU2_31: U2.31
NetU2_32: U2.32
NetU2_33: U2.33
NetU2_34: U2.34
NetU2_35: U2.35
NetU2_36: U2.36
NetU2_37: U2.37
NetU2_38: U2.38
NetU2_39: U2.39
NetU2_40: U2.40
NetU2_41: U2.41
NetU2_42: U2.42
NetU2_43: U2.43
NetU2_44: U2.44
NetU2_45: U2.45
NetU2_46: U2.46
NetU2_47: U2.47
NetU2_48: U2.48
NetU2_51: U2.51
NetU2_52: U2.52
NetU2_53: U2.53
NetU2_54: U2.54
NetU2_55: U2.55
NetU2_56: U2.56
NetU2_57: U2.57
NetU2_58: U2.58
NetU2_59: U2.59
NetU2_60: U2.60
NetU2_61: U2.61
NetU2_62: U2.62
NetU2_63: U2.63
NetU2_64: U2.64
NetU2_65: U2.65
NetU2_66: U2.66
NetU2_67: U2.67
NetU2_68: U2.68
NetU2_69: U2.69
NetU2_70: U2.70
NetU2_71: U2.71
NetU2_78: U2.78
NetU2_79: U2.79
NetU2_80: U2.80
NetU2_81: U2.81
NetU2_82: U2.82
NetU2_83: U2.83
NetU2_84: U2.84
NetU2_85: U2.85
NetU2_86: U2.86
NetU2_87: U2.87
NetU2_88: U2.88
NetU2_90: U2.90
NetU2_91: U2.91
NetU2_92: U2.92
NetU2_93: U2.93
NetU2_95: U2.95
NetU2_96: U2.96
NetU2_97: U2.97
NetU2_98: U2.98
NetU4A_8: U4A.8
NetU4B_8: U4B.8
NetU6A_1: U6A.1 U6A.4
NetU6B_1: U6B.1 U6B.4
NetU10_5: U10.5
NetU10_6: U10.6
NRST: J1.10 R7.1 SW2.2 SW2.3 U2.14
OSC_1: C23.1 U2.12 X1.2
OSC_2: C24.1 U2.13 X1.1
SCL: R24.1 U1.5
SDA: R25.1 U1.4
SWA: L2A.1 U4A.7
SWB: L2B.1 U4B.7
TEMP_MEAS_A: U7.9 U7.10 U7.11
TEMP_MEAS_EN: U7.6
TEMP_VMEAS: U8.1 U8.4
VBAT: F5B.1 Q1.1 Q1.2 Q1.3 Q6A.4 R8.1 R9.2 R26A.2 U3.3
VBAT_FUSED: C3.1 C13.1 F1.2 F2.2 F3.2 F4.2 R2.1 R8.2 U1.9 U3.2 U3.7
VBAT_RAW: F1.1 F2.1 F3.1 F4.1 J3.1
VBootstrap: R21.2 SW1.2 SW1.3
VBUS: F5A.1 J4.1 J5.1 J6.1 J7.1 Q2.1 Q2.2 Q2.3 Q6B.4 R10.1 R26B.2
VCAP_1: C22.1 U2.49
VCAP_2: C21.1 U2.73
pads on no net: U1.11 U2.8 U2.9 U10.EP

## Text inside footprints (layer, text, board x,y; h text height)
J4: Top Overlay "-" at 5339.96,3797.24 h39.37 r90; Top Overlay "+" at 5339.96,3236.22 h39.37 r90; Top Overlay "F" at 5337.98,3518.7 h39.37 r90
J5: Top Overlay "-" at 4946.26,3797.24 h39.37 r90; Top Overlay "+" at 4946.26,3236.22 h39.37 r90; Top Overlay "F" at 4944.28,3518.7 h39.37 r90
J6: Top Overlay "-" at 4552.56,3797.24 h39.37 r90; Top Overlay "+" at 4552.56,3236.22 h39.37 r90; Top Overlay "F" at 4550.58,3518.7 h39.37 r90
J7: Top Overlay "-" at 4158.86,3797.24 h39.37 r90; Top Overlay "+" at 4158.86,3236.22 h39.37 r90; Top Overlay "F" at 4156.88,3518.7 h39.37 r90